# Altium PCB RAD_V3_Signal_Conditioning.PcbDoc
Units mm, origin at the board's own origin, x right, y up, seen from the top; angles counter-clockwise.
Board outline 25 x 28.2 mm, 2 copper layers (Top Layer, Bottom Layer); 25 components, 20 nets, 127 pads, 0 vias.
Unrouted connection lines stored in the file: 85.
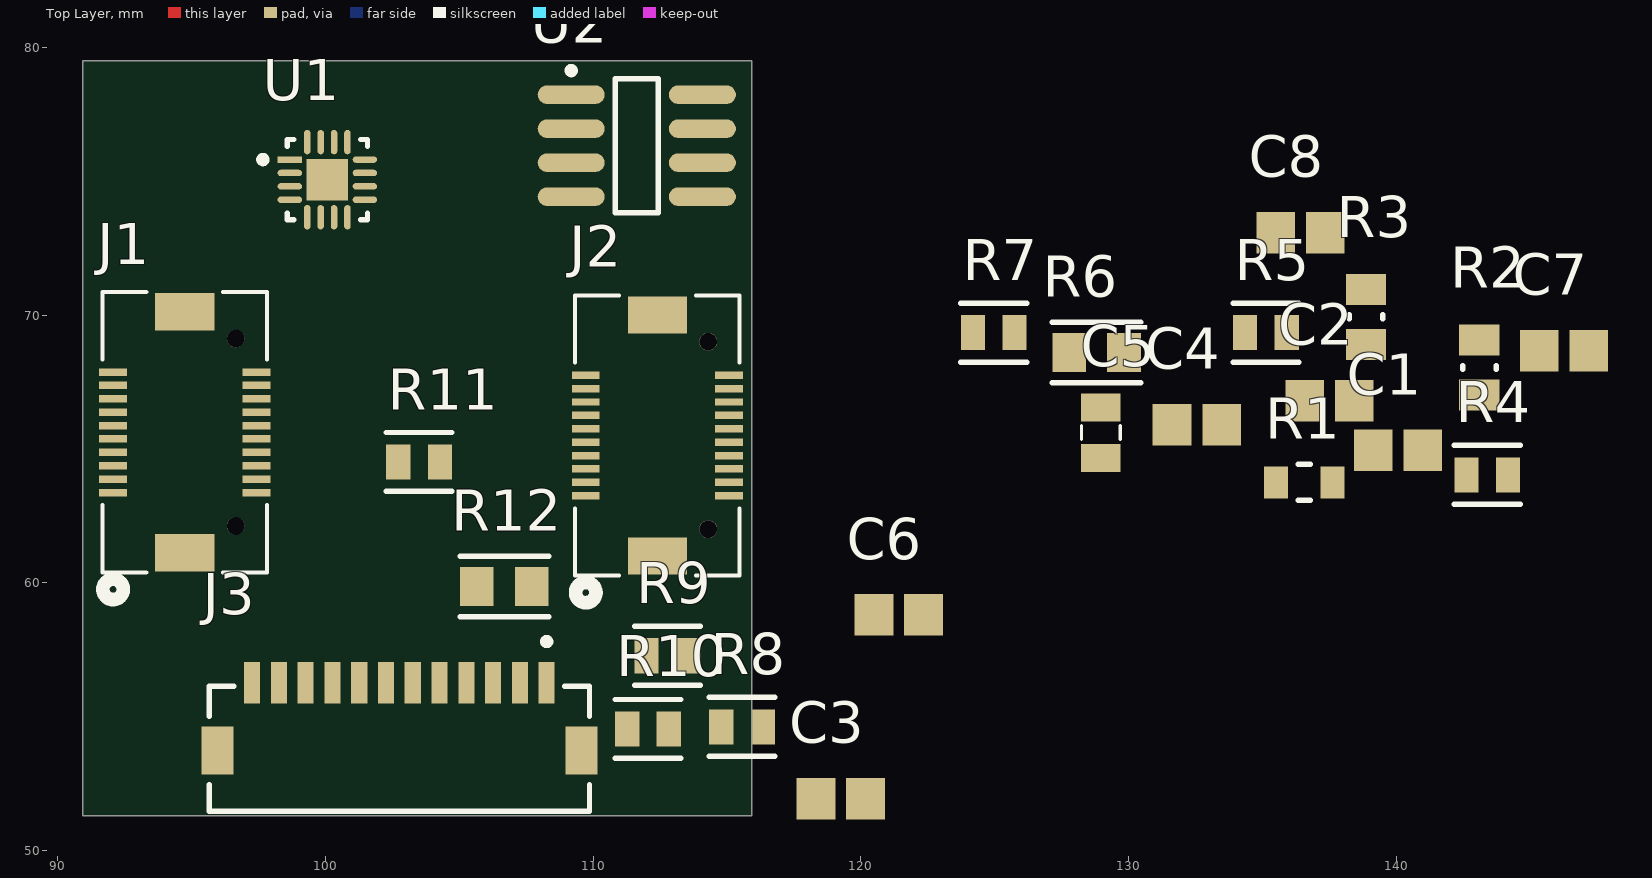
[diagram p0: Top Layer view]
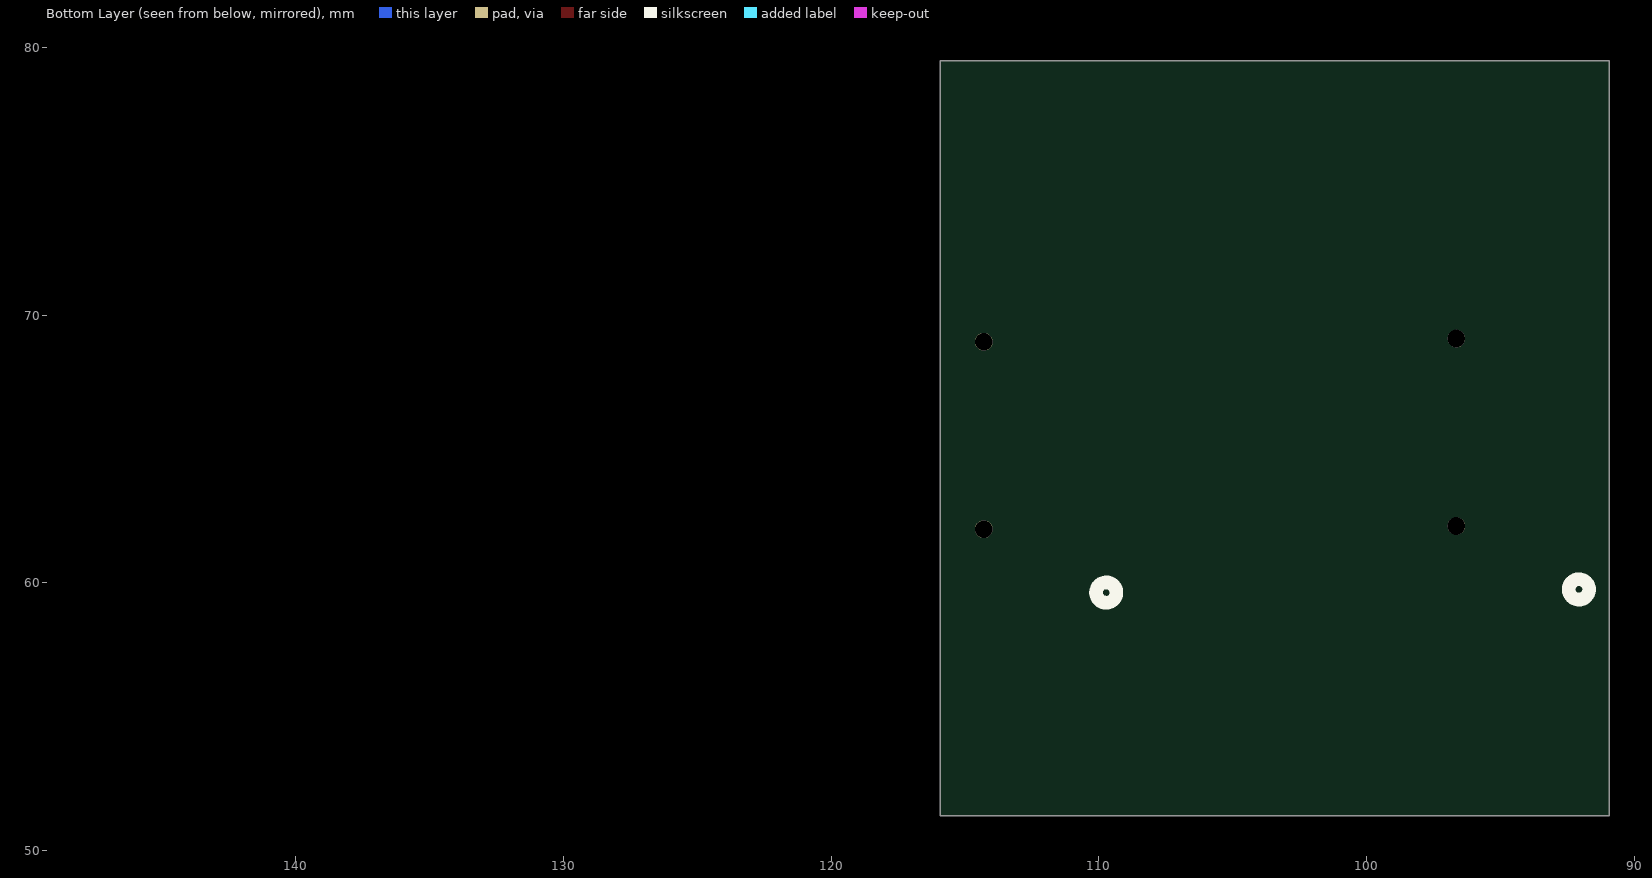
[diagram p1: Bottom Layer view, seen from below]

## Layer stack, top to bottom
Top Solder: solder mask 0.0102, Solder Resist, Dk 3.5
Top Layer: signal copper 0.0356
Dielectric 1: dielectric 0.32, FR-4, Dk 4.8
Bottom Layer: signal copper 0.0356
Bottom Solder: solder mask 0.0102, Solder Resist, Dk 3.5

## Board outline
90.932,51.308 90.932,79.508 115.932,79.508 115.932,51.308

## Design rules (kind name [scope] priority, off if disabled: settings)
Clearance [All] p1: gap=0.254 ignorepadtopadclearanceinfootprint=FALSE
PolygonConnect [All] p1: connectstyle=Relief reliefconductorwidth=0.254 reliefentries=4 polygonreliefangle="90 Angle" airgapwidth=0.254
RoutingVias [All] p1: holewidth=0.711 width=1.27 viastyle="Through Hole" minholewidth=0.711 minwidth=1.27 maxholewidth=0.711 maxwidth=1.27
SolderMaskExpansion [All] p1: expansion=0 istentingtop=FALSE
SupplyNets "Schematic Supply Nets_18" [InNet('OUT1')] p1: voltage=0.000
SupplyNets "Schematic Supply Nets_4" [InNet('VB')] p2: voltage=0.000
SupplyNets "Schematic Supply Nets_3" [InNet('DAC')] p3: voltage=0.000
SupplyNets "Schematic Supply Nets_14" [InNet('IN1-')] p4: voltage=0.000
SupplyNets "Schematic Supply Nets_12" [InNet('IN1+')] p5: voltage=0.000
SupplyNets "Schematic Supply Nets_11" [InNet('3V3')] p6: voltage=0.000
SupplyNets "Schematic Supply Nets_10" [InNet('VAN2')] p7: voltage=0.000
SupplyNets "Schematic Supply Nets_9" [InNet('SDA')] p8: voltage=0.000
SupplyNets "Schematic Supply Nets_8" [InNet('GND')] p9: voltage=0.000
SupplyNets "Schematic Supply Nets_7" [InNet('VBR')] p10: voltage=0.000
SupplyNets "Schematic Supply Nets_6" [InNet('SCL')] p11: voltage=0.000
SupplyNets "Schematic Supply Nets_5" [InNet('VOCM')] p12: voltage=0.000
SupplyNets "Schematic Supply Nets_2" [InNet('VAN1')] p13: voltage=0.000
Width [All] p1: maxlimit=0.254 minlimit=0.254 preferedwidth=0.254
30 further rules are at their usual default settings.

## Components (designator, comment, footprint, x,y, rotation, side; value= is the part's Value field where it differs from the comment)
C1 "0.1uF" CAPC2013X145X50ML20T20 140.063,64.948 r0 top
C2 "0.1uF" CAPC2013X145X50ML20T20 137.505,66.802 r0 top
C3 "0.1uF" CAPC2013X145X50ML20T20 119.253,51.943 r0 top value="1 uF"
C4 "0.1uF" CAPC2013X145X50ML20T20 132.552,65.913 r0 top
C5 "100uF" CAPACITOR_0805_2012M-70N 128.963,65.608 r90 top
C6 "0.1uF" CAPC2013X145X50ML20T20 121.412,58.801 r0 top
C7 "0.1uF" CAPC2013X145X50ML20T20 146.261,68.672 r0 top value="1 uF"
C8 "0.1uF" CAPC2013X145X50ML20T20 136.421,73.072 r0 top value="1 uF"
J1 "DF17(3.0)-20DS-0.5V(57)" CONN_DF173.0-20DS-0.5V57_HIR 94.75,65.623 r90 top
J2 "DF17(3.0)-20DS-0.5V(57)" CONN_DF173.0-20DS-0.5V57_HIR 112.403,65.504 r90 top
J3 "504449-1207" FP-504449-1207-MFG 102.767,53.808 r0 top
R1 "68Ohm" FP-AC0805-MFG 136.559,63.754 r0 top value=68Ω
R2 "2k" FP-MCU0805-IPC_A 143.103,68.044 r90 top
R3 "2k" FP-MCU0805-IPC_A 138.87,69.937 r270 top
R4 "1K" FP-CRGCQ0805-IPC_C 143.396,64.033 r0 top value=1KΩ
R5 "100K" FP-CRGCQ0805-IPC_C 135.128,69.342 r0 top value=100KΩ
R6 "2Meg" FP-RK73H2A-IPC_A 128.804,68.604 r0 top
R7 "10k" FP-CRGCQ0805-IPC_C 124.968,69.342 r0 top value=10KΩ
R8 "100K" FP-CRGCQ0805-IPC_C 115.568,54.623 r0 top value=100KΩ
R9 "1k" FP-CRGCQ0805-IPC_C 112.776,57.277 r0 top value=1KΩ
R10 "1K" FP-CRGCQ0805-IPC_C 112.05,54.544 r0 top value=1KΩ
R11 "1K" FP-CRGCQ0805-IPC_C 103.505,64.516 r0 top value=1KΩ
R12 "2Meg" FP-RK73H2A-IPC_A 106.686,59.868 r0 top
U1 "LT6402IUD-6#TRPBF" FP-UD-16-05-08-1691-IPC_B 100.076,75.057 r0 top
U2 "LTC2050IS8#TRPBF" LT-S8-8_M 111.633,76.327 r0 top

## Footprints (in the part's own frame and the unit in brackets; to place one, negate y for a bottom-side part, rotate by r counter-clockwise, add the part's x,y. Pads: shape width x height; smd on the part's side, far side on the other; paste and mask are expansions set on the pad)
CAPACITOR_0805_2012M-70N [mm] "Capacitor, 0805 (2012 metric), 0.7mm high, nominal pads,"
  rect 1.04x1.47 smd mask+0.051: 1(-0.94,0) 2(0.94,0)
  silkscreen extent -0.25,-0.72 0.25,0.72, body extent -1,-0.73 1,0.73, height 1.23
CAPC2013X145X50ML20T20 [mm] "Chip Capacitor, 2-Leads, Body 2.00x1.25mm, IPC Low Density"
  rect 1.45x1.55 smd: 1(-0.925,0) 2(0.925,0)
  body extent -1.1,-0.72 1.1,0.72, height 1.45
CONN_DF173.0-20DS-0.5V57_HIR [mil]
  rect 11x41 smd paste+0 mask+0: 1(-88.58,105.31) 2(-88.58,-105.31) 3(-68.9,105.31) 4(-68.9,-105.31) 5(-49.21,105.31) 6(-49.21,-105.31) 7(-29.53,105.31) 8(-29.53,-105.31) 9(-9.84,105.31) 10(-9.84,-105.31) 11(9.84,105.31) 12(9.84,-105.31) 13(29.53,105.31) 14(29.53,-105.31) 15(49.21,105.31) 16(49.21,-105.31) 17(68.9,105.31) 18(68.9,-105.31) 19(88.58,105.31) 20(88.58,-105.31)
  rect 55x87 smd paste-43.5 mask-43.5: 21(-177.17,0) 22(177.17,0)
  round 26 / inner round 60 / far side round 26 hole 26 unplated paste-99999 mask+0: 23(-137.8,-74.8) 24(137.8,-74.8)
  silkscreen extent -246,-121 206,121
FP-504449-1207-MFG [mm]
  rect 0.6x1.55 smd paste+0 mask+0: 1(5.5,2.46) 2(4.5,2.46) 3(3.5,2.46) 4(2.5,2.46) 5(1.5,2.46) 6(0.5,2.46) 7(-0.5,2.46) 8(-1.5,2.46) 9(-2.5,2.46) 10(-3.5,2.46) 11(-4.5,2.46) 12(-5.5,2.46)
  rect 1.2x1.8 smd paste+0 mask+0: 13(-6.8,-0.065) 14(6.8,-0.065)
  silkscreen extent -7.1,-2.33 7.1,4.12, body extent -7.5,-2.43 7.5,3.33, height 0.25
FP-AC0805-MFG [mm]
  rect 0.9x1.2 smd paste+0 mask+0: 1(-1.05,0) 2(1.05,0)
  silkscreen extent -0.23,-0.67 0.23,0.67, body extent -1.6,-0.77 1.6,0.77, height 0.25
FP-CRGCQ0805-IPC_C [mm]
  rect 0.906x1.31 smd paste+0 mask+0: 1(-0.776,0) 2(0.776,0)
  silkscreen extent -1.23,-1.1 1.23,1.1, body extent -1.33,-0.8 1.33,0.8, height 0.25
FP-MCU0805-IPC_A [mm]
  rect 1.159x1.508 smd paste+0 mask+0: 1(-1.027,0) 2(1.027,0)
  silkscreen extent -0.07,-0.63 0.07,0.63, body extent -2.11,-1.25 2.11,1.25, height 0.25
FP-RK73H2A-IPC_A [mm]
  rect 1.255x1.462 smd paste+0 mask+0: 1(-1.025,0) 2(1.025,0)
  silkscreen extent -1.65,-1.13 1.65,1.13, body extent -2.15,-1.23 2.15,1.23, height 0.25
FP-UD-16-05-08-1691-IPC_B [mm]
  rect 0.91x0.242 smd paste+0 mask+0: 1(-1.401,0.75)
  rrect100% 0.91x0.242 smd paste+0 mask+0: 2(-1.401,0.25) 3(-1.401,-0.25) 4(-1.401,-0.75) 9(1.401,-0.75) 10(1.401,-0.25) 11(1.401,0.25) 12(1.401,0.75)
  rrect100% 0.242x0.91 smd paste+0 mask+0: 5(-0.75,-1.401) 6(-0.25,-1.401) 7(0.25,-1.401) 8(0.75,-1.401) 13(0.75,1.401) 14(0.25,1.401) 15(-0.25,1.401) 16(-0.75,1.401)
  rect 1.55x1.55 smd paste-1000 mask+0: 17(0,0)
  silkscreen extent -2.53,-1.5 1.5,1.5, body extent -2.11,-2.11 2.11,2.11, height 0.25
LT-S8-8_M [mm] "SOIC, 8-Leads, Body 4.9x3.9mm, Pitch 1.27mm, IPC Low Density"
  oval 2.5x0.7 smd: 1(-2.45,1.905) 2(-2.45,0.635) 3(-2.45,-0.635) 4(-2.45,-1.905) 5(2.45,-1.905) 6(2.45,-0.635) 7(2.45,0.635) 8(2.45,1.905)
  silkscreen extent -2.57,-2.5 0.8,2.93, body extent -2,-2.5 2,2.5, height 1.76

## Part data
C1 C2 C4 C6: library part CMP-1036-04409-2, Manufacturer=Vitramon, Part Number=VJ0805Y104JXXCW1BC
C3 C7 C8: library part CMP-03422-001015-1, "CC0805 1 uF X7R 10.00% 50 V", Capacitance="1 uF", Manufacturer=Yageo, Manufacturer Part Number=CC0805KFX7R9BB105, Package=CC0805-0.85, Temperature="-30°C to +85°C", Temperature Characteristic=X7R, Temperature Range High=+85°C, Temperature Range Low=-30°C, Tolerance=0.1, Voltage Rating="50 V", Automotive=No, Category=Cap, ComponentLink2Description=Datasheet, ComponentLink2URL=http://www.yageo.com/documents/recent/UPY-GPHC_Y5V_6.3V-to-50V_8.pdf, Device Class L1="Passive Components", Device Class L2=Capacitors, Device Class L3="Ceramic Capacitors", Footprint Url=http://www.yageo.com/exep/pages/download/literatures/UPY-C_GEN_24.pdf, Height=0.95mm, Ipc Land Pattern Name=CAPC200125X85, Lead Free=Yes, Material=Ceramic, Mouser Description="Cap Ceramic 1uF 50VDC X7R 10% SMD 0805 125°C BP", Octopart=https://octopart.com/cc0805kfx7r9bb105-yageo-76378930, RoHS=TRUE
C5: library part GRM21BR60J107ME15L, "Passive - Capacitor, 0805, 100uF Max, X5R, 6.3V ±20%, -55°C ~ 85°C, 0805 (2012 Metric). 20uF @ 6.3V", Capacitance at Rated Voltage=20%, Package=0805, Rated Voltage=6.3V, Supplier 1 Part No.=490-GRM155R61E225KE11JCT-ND, Temp Range="-55°C ~ 85°C", Temperature Coefficient=X5R, Tolerance=±20%, APSS Standard Part="APSS Standard", MF Part No.=GRM21BR60J107ME15L, Supplier 1=Digikey
J1 J2: library part DF173.0-20DS-0.5V57, "Description", Manufacturer_Name=Hirose, Copyright="Copyright (C) 2025 Ultra Librarian. All rights reserved.", Manufacturer_Part_Number=DF17(3.0)-20DS-0.5V(57), RefDes=RefDes, Type=Type
J3: library part CMP-00257-74739849-1, "504449-1207 Conn Shrouded Header (4 Sides) HDR 12 POS 1mm Solder ST SMD T/R", Manufacturer Lifecycle Status=ACTIVE, Contact Plating=Gold, Country of Origin=JP, Lifecycle Status=Production, NexarPartId=74739849, Number of Circuits=12, Number of Pins=12, Number of Rows=1, Orientation=Vertical, Plating=Gold, RoHS=Compliant
R1: library part CMP-03412-037099-1, "RES SMD 68 OHM 5% 1/8W 0805", Manufacturer=Yageo, Manufacturer Part Number=AC0805JR-0768RL, Package=AC0805, Power Rating=1/8W, Resistance=68Ω, Temperature="-55°C to +155°C", Temperature Range High=+155°C, Temperature Range Low=-55°C, Tolerance=0.05, Voltage Rating=150V, Automotive=Yes, Automotive Grade="Grade 0", Category=Res, ComponentLink2Description=Datasheet, ComponentLink2URL=http://www.yageo.com/documents/recent/PYu-AC_51_RoHS_L_6.pdf, Composition="Thick Film", Device Class L1="Passive Components", Device Class L2=Resistors, Device Class L3="Chip SMD Resistors", Digikey Description="RES SMD 68 OHM 5% 1/8W 0805", Footprint Url=http://www.yageo.com/exep/pages/download/literatures/PYu-R_Mount_10.pdf, Height=0.6mm, Ipc Land Pattern Name=RESC200125X50, Lead Free=Yes, Mouser Description="Thick Film Resistors - SMD 1/8W 68ohm 5% AEC-Q200", Octopart=https://octopart.com/ac0805jr-0768rl-yageo-30511008, RoHS=TRUE, Series=AC
R2 R3: library part CMP-02407-000077-1, "RES 1.05K OHM 0.5% 1/5W 0805", Case/Package=0805, Max Operating Temperature=125°C, Max Power Dissipation=125mW, Min Operating Temperature=-55°C, Package Quantity=5000, Resistance=2kR, Temperature Coefficient=25ppm/°C, Tolerance=0.1%, Composition="Thin Film", Contact Plating=Tin, Depth=1.25mm, Height=0.022inch, Lead Free="Lead Free", Length=0.079inch, Military Standard=Not, Number of Terminations=2, Packaging="Tape and Reel", Radiation Hardening=No, Width=0.049inch
R4 R9 R10 R11: library part CMP-03211-004613-1, "CRGCQ 0805 1K0 1%", Ambient Temperature Range High=+70°C, Manufacturer="TE Connectivity", Manufacturer Part Number=CRGCQ0805F1K0, Package=CRGCQ0805, Power Rating=0.125W, Resistance=1KΩ, Temperature="-55°C to +155°C", Temperature Coefficient=±100ppm/°C, Temperature Range High=+155°C, Temperature Range Low=-55°C, Tolerance=0.01, Voltage Rating=150V, Automotive=Yes, Automotive Grade="Grade 685", Category=Res, ComponentLink2Description=Datasheet, ComponentLink2URL=https://www.te.com/commerce/DocumentDelivery/DDEController?Action=showdoc&DocId=Data+Sheet%7F1773204-3%7F1%7Fpdf%7FEnglish%7FENG_DS_1773204-3_1.pdf%7F4-2176341-694, Composition="Thick Film", Device Class L1="Passive Components", Device Class L2=Resistors, Device Class L3="Chip SMD Resistors", Digikey Description="CRGCQ 0805 1K0 1%", Height=0.65mm, Ipc Land Pattern Name=RESC200125X55, Lead Free=Yes, Octopart=https://octopart.com/crgcq0805f1k0-te+connectivity-91018154, RoHS=TRUE, Series=CRGCQ
R5 R8: library part CMP-03211-000816-1, "CRGCQ 0805 100K 1%", Ambient Temperature Range High=+70°C, Manufacturer="TE Connectivity", Manufacturer Part Number=CRGCQ0805F100K, Package=CRGCQ0805, Power Rating=0.125W, Resistance=100KΩ, Temperature="-55°C to +155°C", Temperature Coefficient=±100ppm/°C, Temperature Range High=+155°C, Temperature Range Low=-55°C, Tolerance=0.01, Voltage Rating=150V, Automotive=Yes, Automotive Grade="Grade 1141", Category=Res, ComponentLink2Description=Datasheet, ComponentLink2URL=https://www.te.com/commerce/DocumentDelivery/DDEController?Action=showdoc&DocId=Data+Sheet%7F1773204-3%7F1%7Fpdf%7FEnglish%7FENG_DS_1773204-3_1.pdf%7F4-2176341-1150, Composition="Thick Film", Device Class L1="Passive Components", Device Class L2=Resistors, Device Class L3="Chip SMD Resistors", Digikey Description="CRGCQ 0805 100K 1%", Height=0.65mm, Ipc Land Pattern Name=RESC200125X55, Lead Free=Yes, Mouser Description="Res Thick Film 0805 100K Ohm 1% 0.125W(1/8W) ±100ppm/C Pad SMD Automotive T/R", Octopart=https://octopart.com/crgcq0805f100k-te+connectivity-91018138, RoHS=TRUE, Series=CRGCQ
R6 R12: library part CMP-04015-092522-1, "2MΩ ±1% 0.25W Chip Resistor 0805 Flat Chip (Anti-Sulfuration) AEC-Q200 Qualified", Case Code (Imperial)=0805, Case Code (Metric)=2012, Max Operating Temperature=155°C, Min Operating Temperature=-55°C, Package Quantity=5000, Power Rating=125mW, Resistance=2MR, Temperature Coefficient=200ppm/°C, Tolerance=1%, Voltage Rating=150V, Case/Package=0805, Height=0.5mm, Length=2mm, Packaging="Tape and Reel", RoHS Compliant=Yes, Termination=SMD/SMT, Weight=0.000194oz, Width=1.2mm
R7: library part CMP-03211-002989-1, "CRGCQ 0805 10K 5%", Ambient Temperature Range High=+70°C, Manufacturer="TE Connectivity", Manufacturer Part Number=CRGCQ0805J10K, Package=CRGCQ0805, Power Rating=0.125W, Resistance=10KΩ, Temperature="-55°C to +155°C", Temperature Coefficient=±100ppm/°C, Temperature Range High=+155°C, Temperature Range Low=-55°C, Tolerance=0.05, Voltage Rating=150V, Automotive=Yes, Automotive Grade="Grade 914", Category=Res, ComponentLink2Description=Datasheet, ComponentLink2URL=https://www.te.com/commerce/DocumentDelivery/DDEController?Action=showdoc&DocId=Data+Sheet%7F1773204-3%7F1%7Fpdf%7FEnglish%7FENG_DS_1773204-3_1.pdf%7F4-2176341-923, Composition="Thick Film", Device Class L1="Passive Components", Device Class L2=Resistors, Device Class L3="Chip SMD Resistors", Digikey Description="CRGCQ 0805 10K 5%", Height=0.65mm, Ipc Land Pattern Name=RESC200125X55, Lead Free=Yes, Mouser Description="Res Thick Film 0805 10K Ohm 5% 0.125W(1/8W) ±100ppm/C Pad SMD Automotive T/R", Octopart=https://octopart.com/crgcq0805j10k-te+connectivity-91018201, RoHS=TRUE, Series=CRGCQ
U1: library part CMP-0359-03805-3, "IC OPAMP DIFF 2 CIRCUIT 16QFN", Case/Package="QFN EP", Input Bias Current=5uA, Input Offset Voltage (Vos)=6.5mV, Input Resistance=240R, Max Operating Temperature=85°C, Max Supply Voltage=5.5V, Min Operating Temperature=-40°C, Min Supply Voltage=4V, Operating Supply Current=30mA, Operating Supply Voltage=5V, Output Current per Channel=35mA, Package Quantity=2500, Power Supply Rejection Ratio (PSRR)=55dB, -3db Bandwidth=300MHz, Amplifier Type=DIFFERENTIAL, Bandwidth=300MHz, Common Mode Rejection Ratio=42dB, Nominal Gain Bandwidth Product=300MHz, Number of Channels=1, Number of Circuits=2, Number of Elements=1, Number of Pins=16, Packaging="Tape and Reel", RoHS Compliant=Yes, Series=-, Slew Rate=400V/µs
U2: library part CMP-0359-03382-2, "Single Channel, Zero-Drift Operational Amplifier, 3 MHz Typical GBW, 2 V/us Typical SR, 2.7 to 6 V, 8-Pin SOIC (S8-8), Industrial, Pb-Free, Reel", Linear Technology Part Number=LTC2050, Manufacturer="Linear Technology", Channels (#)=1, ComponentLink1Description="Manufacturer URL", ComponentLink1URL=http://www.linear.com/, ComponentLink2Description=Datasheet, ComponentLink2URL=http://cds.linear.com/docs/en/datasheet/2050fc.pdf, ComponentLink3Description="Package Specification", ComponentLink3URL=http://cds.linear.com/docs/en/packaging/05081610_G_SO8.pdf, DatasheetVersion="Rev C", GBW (MHz) Typical=3, Is (mA) Typical=0.8, Mounting Technology="Surface Mount", PackageDescription="8-Pin Plastic Small Outline, Body 4.9 x 3.9 mm, Pitch 1.27 mm", PackageReference=LT-S8-8, PackageVersion="Rev G", Packing=Reel, PartNumber=LTC2050IS8#TRPBF, RevisionNote="URLs updated", RoHS=Pb-Free, SR (V/us) Typical=2, Type=ZD, Vos (mV) Typical=0.0005, Vs Max (V)=6, Vs Min (V)=2.7

## Nets (pads, with @x,y where several pads share a name; then routed paths per layer and width w, separated by ;. In a path a pad name is that pad's centre, name@x,y a point inside that pad or via, vN(x,y) a via of type N, cw(c..) or ccw(c..) an arc to the next point about the centre after c; other vN are vias at no path point)
3V3: C1.2 C5.2 J1.1 J1.7 J1.13 J2.2 J2.8 J2.14 J3.2 R2.2 U1.1 U1.3 U1.10 U2.7
DAC: J3.7 R9.1
GND: C1.1 C4.1 C5.1 C7.1 C8.1 J1.2 J1.4 J1.6 J1.8 J1.10 J1.12 J1.14 J1.16 J1.17 J2.1 J2.3 J2.5 J2.7 J2.9 J2.11 J2.13 J2.15 J2.17 J3.1 J3.4 J3.9 J3.10 J3.11 J3.12 R3.1 U1.4 U1.9 U1.11 U1.12 U1.17 U2.4
IN1+: R1.2 U1.15 U1.16
IN1-: C6.1 R1.1 U1.13 U1.14
NetC3_1: C3.1 R5.1 R8.2
NetC7_2: C7.2 R4.1 R7.2
NetC8_2: C8.2 R7.1 R9.2
NetR6_2: R6.2 R10.2 U2.3
NetR10_1: R10.1 U1.6
NetR11_1: R11.1 U1.7
NetR11_2: R11.2 R12.2 U2.2
OUT1: J3.3 R12.1 U2.6
SCL: J1.3 J3.5
SDA: J2.4 J3.6
VAN1: C2.2 J1.9 J1.19 R4.2
VAN2: J2.20
VB: J3.8 R5.2
VBR: C6.2 J1.15 J1.18 J1.20 J2.16 J2.18 J2.19 R8.1
VOCM: C4.2 R2.1 R3.2 R6.1 U1.2
pads on no net: C2.1 C3.2 J1.5 J1.11 J1.21 J1.22 J1.23 J1.24 J2.6 J2.10 J2.12 J2.21 J2.22 J2.23 J2.24 J3.13 J3.14 U1.5 U1.8 U2.1 U2.5 U2.8

## Silkscreen, mask and mechanical layers (free items; w line width, h text height)
Mechanical 1:
  lines w0.254: 59.055,-124.206 84.055,-124.206 84.055,-96.006 59.055,-96.006 59.055,-124.206 ; 90.932,51.308 115.932,51.308 115.932,79.508 90.932,79.508 90.932,51.308

## Text inside footprints (layer, text, board x,y; h text height)
J1: Mechanical 13 "RefDes2" at 95.385,61.94 h1.27 r90
J2: Mechanical 13 "RefDes2" at 113.038,61.821 h1.27 r90